# Altium PCB E1811HUBPCB_3.PcbDoc
Units mil, origin at the board's own origin, x right, y up, seen from the top; angles counter-clockwise.
Board outline 4490 x 1810 mil, 2 copper layers (Top Layer, Bottom Layer), stack 62.8 mil thick; 15 components, 40 nets, 96 pads, 5 vias.
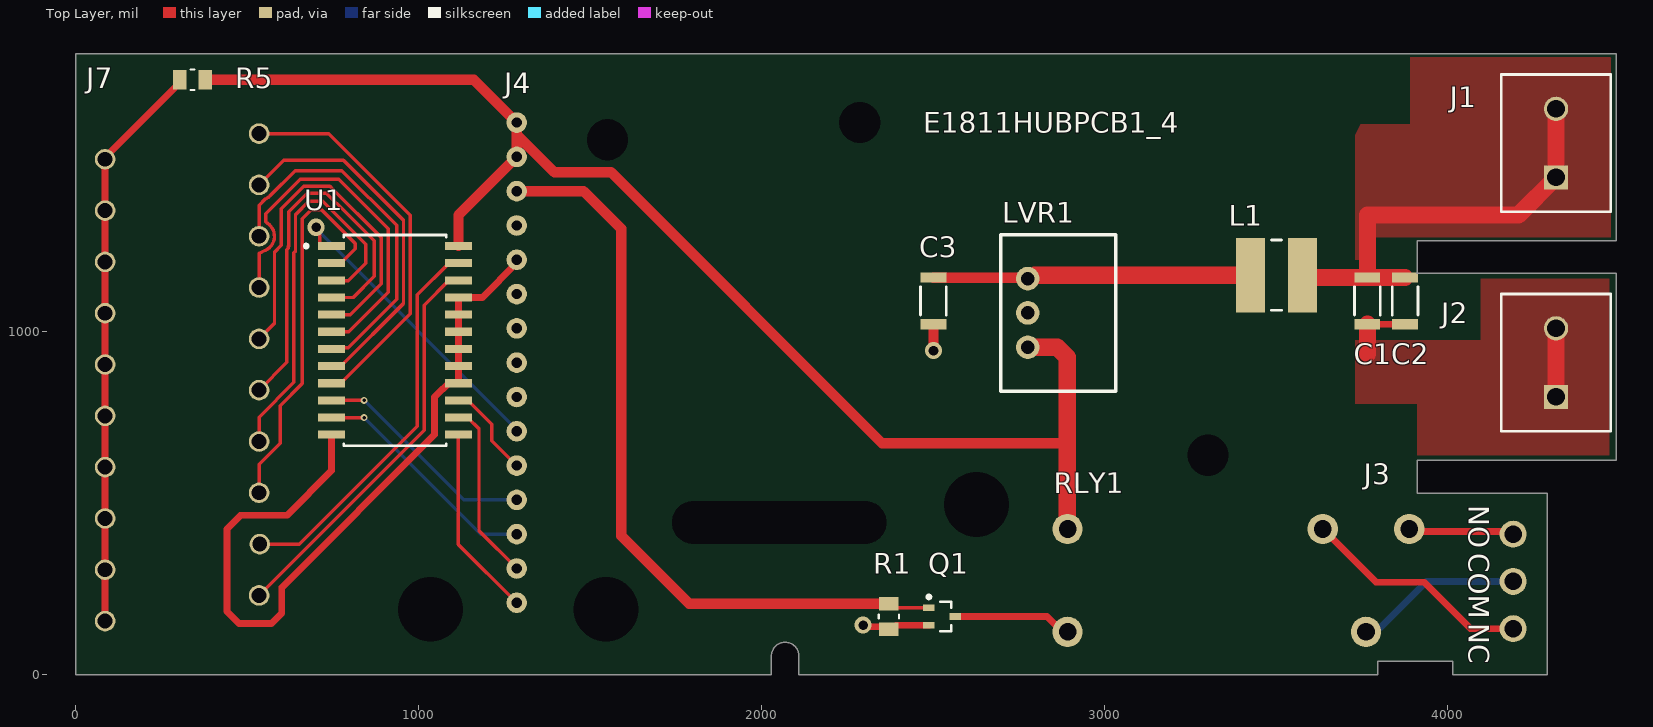
[diagram p0: Top Layer view]
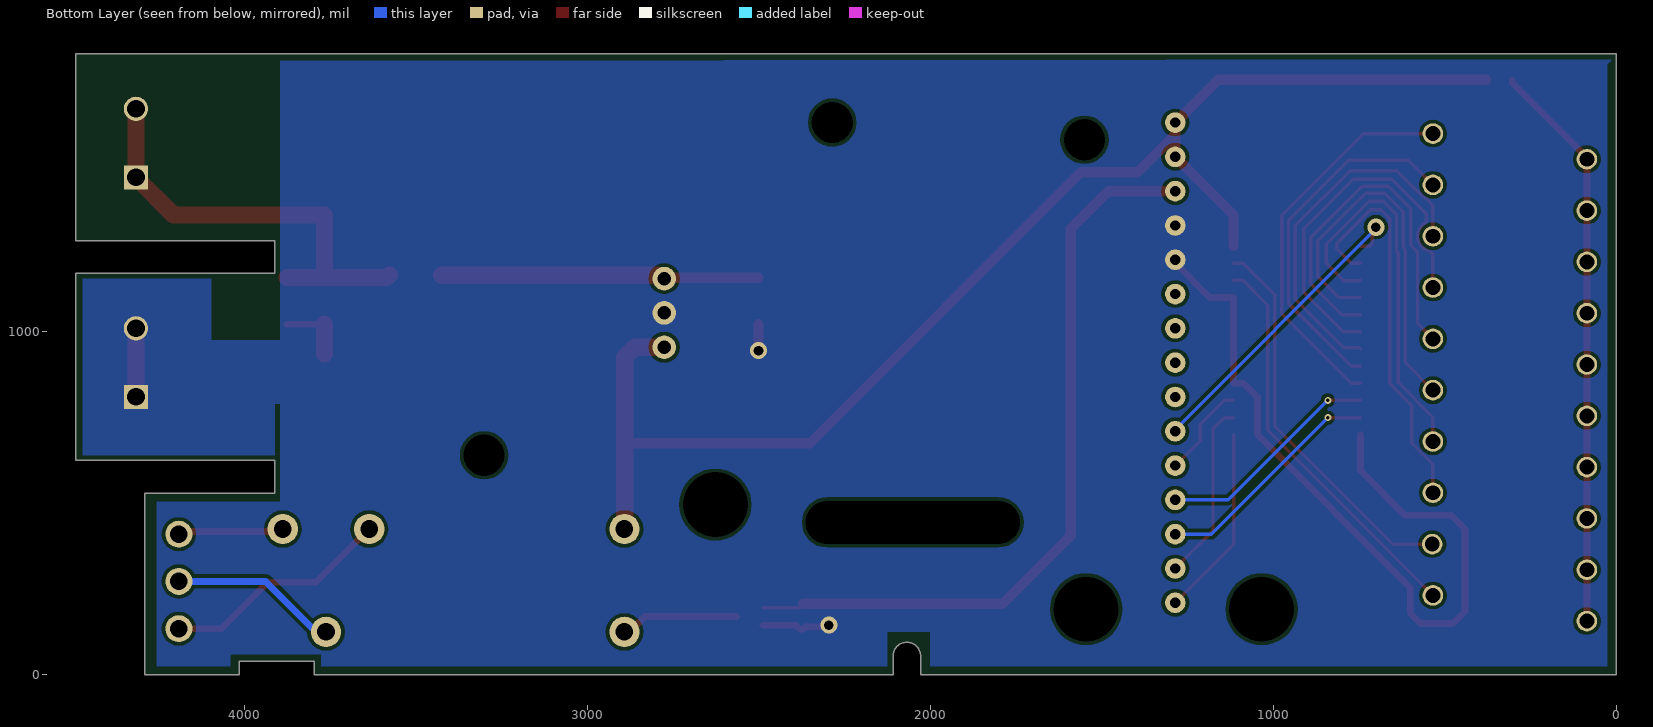
[diagram p1: Bottom Layer view, seen from below]
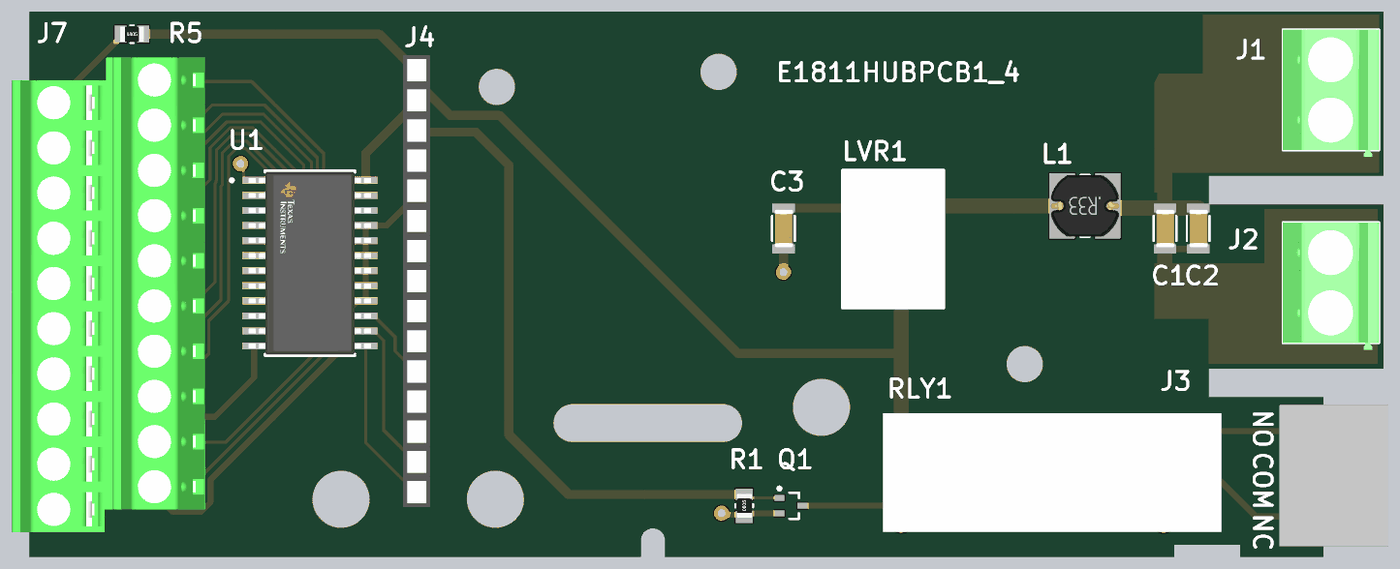
[diagram p2: 3D render of the assembled board from above, using the file's embedded part models]

## Layer stack, top to bottom
Top Solder: solder mask 0.4, Solder Resist, Dk 3.5
Top Layer: signal copper 1.4
Dielectric 1: dielectric 60, FR-4, Dk 4.8
Bottom Layer: signal copper 1.4
Bottom Solder: solder mask 0.4, Solder Resist, Dk 3.5

## Board outline
0,0 2027.5,0 2027.5,55 cw(c2067.5,55) 2107.5,55 2107.5,0 3795,0 3795,40 4013.62,40 4013.62,39.37 4013.78,0 4290,0 4290,530 3910,530 3910,625 4490,625 4490,1170 3910,1170 3910,1265 4490,1265 4490,1810 0,1810

## Design rules (kind name [scope] priority, off if disabled: settings)
Clearance [All] p1: gap=10 ignorepadtopadclearanceinfootprint=TRUE
Creepage [All] p1: checkdistance=10
PlaneConnect [All] p1: planeconnectstyle=Direct reliefexpansion=20 reliefentries=4 reliefconductorwidth=10 reliefairgap=10
PolygonConnect [All] p1: connectstyle=Direct reliefconductorwidth=10 reliefentries=4 polygonreliefangle="90 Angle" airgapwidth=10
RoomDefinition Sheet1 [InComponentClass('Sheet1')] p1: confinementstyle=ConfineIn formatcopy=TRUE lockcomponents=FALSE outline 6045,60 14050,60 14050,2110 6045,2110
RoutingVias [All] p1: holewidth=28 width=50 viastyle="Through Hole" minholewidth=28 minwidth=50 maxholewidth=28 maxwidth=50
SolderMaskExpansion [All] p1: expansion=4 istentingtop=FALSE
Width [All] p1: maxlimit=60 minlimit=10 preferedwidth=10
29 further rules are at their usual default settings.

## Components (designator, comment, footprint, x,y, rotation, side; value= is the part's Value field where it differs from the comment)
C1 "CGA5L3X5R1H106K160AB" FP-CGA5L-0_3-0_1-IPC_B 3765,1090 r270 top
C2 "CGA5L3X5R1H106K160AB" FP-CGA5L-0_3-0_1-IPC_B 3875,1090 r270 top
C3 "CGA5L3X5R1H106K160AB" FP-CGA5L-0_3-0_1-IPC_B 2500,1090 r270 top
J1 "1729128" PHOE-1729128-2_V 4315,1550 r90 top
J2 "1729128" PHOE-1729128-2_V 4315,910 r90 top
J3 "39502-1003" 39502-1003 4190,410 r270 top
J4 "PPPC151LFBN-RC" PPPC151LFBN-RC 1285,210 r90 top
J7 "1708110" 1708110 533.82,1577.83 r270 top
L1 "744774122" WE-PD2-M 3500,1165 r180 top
LVR1 "173010542" 173010542 3030.91,826.65 r90 top
Q1 "BSS138PW,115" NXP-SOT323_M 2525,170 r0 top
R1 "10K" RESC2012N 2370,170 r90 top
R5 "10K" RESC2012N 340,1735 r0 top
RLY1 "G6RL-14-ASI-DC3" G6RL-14-ASI-DC3 2890.91,125 r180 top
U1 "CD74HC4067M96" FP-DW0024A-MFG 930,975 r0 top

## Footprints (in the part's own frame and the unit in brackets; to place one, negate y for a bottom-side part, rotate by r counter-clockwise, add the part's x,y. Pads: shape width x height; smd on the part's side, far side on the other; paste and mask are expansions set on the pad)
39502-1003 [mm]
  round 2 hole 1.3: 1(0,0) 2(3.5,0) 3(7,0)
  body extent -2.41,-1.14 9.5,8, height 6.86
1708110 [mm]
  round 1.524 hole 1.1: 1(0,0) 2(3.8,0) 3(7.6,0) 4(11.4,0) 5(15.2,0) 6(19,0) 7(22.8,0) 8(26.6,0) 9(30.4,0.054) 10(34.2,0) 11(1.9,-11.4) 12(5.7,-11.4) 13(9.5,-11.4) 14(13.3,-11.4) 15(17.1,-11.4) 16(20.9,-11.4) 17(24.7,-11.4) 18(28.5,-11.4) 19(32.3,-11.4) 20(36.1,-11.4)
  body extent -2.03,-15.06 37.98,1.27, height 16.2
173010542 [mm]
  round 1.75 hole 1: 1(8.34,6.5) 2(5.8,6.5) 3(3.26,6.5)
  silkscreen extent 0,0 11.6,8.5, body extent 0,0 11.6,8.5, height 10.25
FP-CGA5L-0_3-0_1-IPC_B [mm]
  rect 0.756x1.906 smd paste+0 mask+0: 1(-1.725,0) 2(1.725,0)
  silkscreen extent -1.05,-0.95 1.05,0.95, body extent -2.35,-1.2 2.35,1.2, height 0.25
FP-DW0024A-MFG [mm]
  rect 2x0.6 smd paste-1000 mask+0: 1(-4.7,6.985) 2(-4.7,5.715) 3(-4.7,4.445) 4(-4.7,3.175) 5(-4.7,1.905) 6(-4.7,0.635) 7(-4.7,-0.635) 8(-4.7,-1.905) 9(-4.7,-3.175) 10(-4.7,-4.445) 11(-4.7,-5.715) 12(-4.7,-6.985) 13(4.7,-6.985) 14(4.7,-5.715) 15(4.7,-4.445) 16(4.7,-3.175) 17(4.7,-1.905) 18(4.7,-0.635) 19(4.7,0.635) 20(4.7,1.905) 21(4.7,3.175) 22(4.7,4.445) 23(4.7,5.715) 24(4.7,6.985)
  silkscreen extent -6.7,-7.8 3.8,7.8, body extent -5.8,-7.98 5.8,7.98, height 0.25
G6RL-14-ASI-DC3 [mm]
  round 2.25 hole 1.3: 1(0,0) 2(-22.1,0) 3(-25.3,-7.62) 4(-18.9,-7.62) 5(0,-7.62)
  body extent -26.95,-8.94 1.55,1.06, height 12.3
NXP-SOT323_M [mm] "SOT23, 3-Leads, Body 2.2x1.35mm, Pitch 0.65mm, IPC Low Density"
  rect 0.85x0.5 smd: 1(-0.975,0.65) 2(-0.975,-0.65) 3(0.975,0)
  silkscreen extent -1.1,-1.1 0.67,1.57, body extent -0.67,-1.1 0.67,1.1, height 1.1
PHOE-1729128-2_V [mm] "Receptacle, 2-Leads, Body 8.1x10.16mm, Pitch 5.08mm"
  rect 1.8x1.8 hole 1.3: 1(-2.54,0)
  round 1.8 hole 1.3: 2(2.54,0)
  silkscreen extent -5.08,-4.05 5.08,4.05, body extent -5.65,-4.05 5.08,4.05, height 10.01
PPPC151LFBN-RC [mil]
  round 60 hole 30: 1(0,0) 2(100,0) 3(200,0) 4(300,0) 5(400,0) 6(500,0) 7(600,0) 8(700,0) 9(800,0) 10(900,0) 11(1000,0) 12(1100,0) 13(1200,0) 14(1300,0) 15(1400,0)
  body extent -45,-44 1456,46, height 371
RESC2012N [mm] "Chip Resistor, Body 2.0x1.3mm, IPC Med Density"
  rect 1x1.45 smd: 1(-0.95,0) 2(0.95,0)
  silkscreen extent -0.15,-0.75 0.15,0.75, body extent -1,-0.63 1,0.63, height 0.59
WE-PD2-M [mm] "SMD Inductor, 2-Leads, Body 5.8 x 5.2 mm"
  rect 2.15x5.5 smd: 1(-1.925,0) 2(1.925,0)
  silkscreen extent -0.38,-2.6 0.38,2.6, body extent -2.89,-2.6 2.89,2.6, height 4.49

## Part data
C1 C2 C3: library part CMP-2000-07597-2, "Cap Ceramic 10uF 50V X5R 10% Pad SMD 1206 +85°C Automotive T/R", Capacitance=10uF, Case Code (Imperial)=1206, Case Code (Metric)=3216, Dielectric=X5R, Max Operating Temperature=85°C, Min Operating Temperature=-55°C, Package Quantity=1, Ratings=AEC-Q200, Tolerance=10%, Voltage Rating=50V, Case/Package=1206, Composition=Ceramic, Depth=1.6mm, Height=1.6mm, Lead Free="Lead Free", Length=3.2mm, Mount="Surface Mount", Packaging="Tape and Reel", Radiation Hardening=No, REACH SVHC="No SVHC", Termination=SMD/SMT, Thickness=0.063inch, Voltage Rating (DC)=50V, Weight=0.000571oz, Width=1.6mm
J1: library part CMP-2000-05815-1, "PCB Terminal Block, 13.5 A, 400 V, 2-Pin THD, RoHS, Bulk", Color=Green, Current=10A, Current Rating=13500mA, Flammability Rating="UL94 V-0", Manufacturer="Phoenix Contact", Max Current Rating=13.5A, Max Operating Temperature=100°C, Max Supply Voltage=400V, Min Operating Temperature=-20°C, Package Description="2-Pin Through Hole Device, Body 8.1 x 10.16 mm, Pitch 5.08 mm", Package Quantity=50, Package Reference=1729128-2, Package Version=03/2015, Test Voltage=4kV, Voltage=300V, Approvals=UL,CSA, Category="Terminal Blocks", ComponentLink1Description=https://datasheet.ciiva.com/823/1729128-823779.pdf?src-supplier=Digi-Key, ComponentLink1URL=https://datasheet.ciiva.com/823/1729128-823779.pdf?src-supplier=Digi-Key, ComponentLink2Description=https://datasheet.ciiva.com/15169/getdatasheetpartid-199310-15169845.pdf?src-supplier=Verical, ComponentLink2URL=https://datasheet.ciiva.com/15169/getdatasheetpartid-199310-15169845.pdf?src-supplier=Verical, ComponentLink3Description=https://datasheet.ciiva.com/16046/1729128-16046181.pdf?src-supplier=Onlinecomponents.com, ComponentLink3URL=https://datasheet.ciiva.com/16046/1729128-16046181.pdf?src-supplier=Onlinecomponents.com, ComponentLink4Description=https://datasheet.ciiva.com/14607/70054405-14607157.pdf?src-supplier=Allied+Electronics, ComponentLink4URL=https://datasheet.ciiva.com/14607/70054405-14607157.pdf?src-supplier=Allied+Electronics, ComponentLink5Description=https://datasheet.ciiva.com/29218/743664-da-01-en-printklemmenblock-mkdsn-1-5-2-5-08-29218154.pdf?src-supplier=Conrad, ComponentLink5URL=https://datasheet.ciiva.com/29218/743664-da-01-en-printklemmenblock-mkdsn-1-5-2-5-08-29218154.pdf?src-supplier=Conrad, Connector Type=Screw, Contact Material=Tin, Datasheet URL=https://datasheet.ciiva.com/16046/1729128-16046181.pdf, Datasheet Version=12/2013, Depth=8.1mm, Height=13.5mm, Housing Color=Green, Housing Material=Polyamide, Insulation Material=Nylon, Lead Free="Lead Free", Length=8.1mm, Manufacturer Part Number=1729128, Manufacturer URL=http://www.phoenixcontact.com/, Mount="Through Hole", Mounting Technology=ThroughHole, No. of Positions=2, No. of Rows=1, Number Of Circuits=2, Number of Contacts=2, Number of Levels=1, Number of Pins=2, Number of Poles=2, Number of Positions=2, Number of Positions Per Level=2, Number of Rows=1, Orientation=Horizontal, Package URL=https://www.phoenixcontact.com/online/portal/pi/pxc/product_detail_page/!ut/p/b1/3VdJjqNKFDxLH8AFycySyWY2ozFsEPOMMQaDOX1XedGL_1Vdm5YXJleknhSKeBkvI6EA8ncAo3AYoDhBQGco6KN7VURTdemj9us_IEKEZo_YHiPAEWEFmDGOHMORkqKYCORBZxgL7ZoaZYcbFFUZ3fqxSY6GOuxydWUuHqz1ynmMFygu583Bob0Ewr6Sd_l-5m-kAueHiB0jpRwZwe58wwtkpxtMYd_LmGcDRU02dRNEyWt6Y2ti5pSyJ_reIkzIulrqApdnbT11V5jnCKbYNCvhEM1MCpPByat_X379-iThf08CI5GfOPqfBeS3BRoBOdD55AKVv0iLwCMq-2BrzXWSGRH7pUGD9uwXQjiph3xL0DKQwdGa0JImiIOmBNOestqgwTHSSs2oOep-78apyXQBvNi8ZLaFjvjWvcaUEBu0MC6Wbe-d6mB0FAebo2lUWinqYaZs5DAYzV0RP9yitUjnGJ0iI9xhZkT42OCQNUJJhkgWINNQLP2JFP6OpMg3JCVg70jqHT0lvKOnhHf0lPuOnnLf0VPuWx6_dxwUIvwk5WMkT0kLL1mh61l2yZVSzG3pYV_bqo-mj6uMKwKwdnnW8Jh5RTOJzMOA5c-eJDaZQw4mTMPH02PvS_ZAqNVjVTo2WyYLkwH_KU1mmmG5kjRhDqPXLwwVHvVOjCM60-fpXvTDfMGW1PVFVS1r4e4yVDk4ZdNbkUHvqPqQSeian4UD39fNKmachqdJ1NJbyk8rXT9mXTvPk3oE5meulKGgiruPJek-4I9hTT6G8ZLOyRSm2RRVbThERQad5OS28hdt4YW4vG0stgYYzsWsK4_7y6DZMjJSCqri1kyiZR5vD7pwIrNR7QwPHTcLTI5qT7eRlpHrdGiupYlqQDJ7zy_CND8fWWBoLRXxk1RVcXiBQwbTD4Xi7KL-FuO94t9xaqweXzH, Packaging=Bulk, Packing=Bulk, PartNumber=1729128, Pitch=5.08mm, Pricing 1="1=1.09000, 10=1.04700, 50=1.00100, 100=0.97370, 250=0.91000, 500=0.83720, 1000=0.77350, 2500=0.73710, 5000=0.69160 (USD)", Radiation Hardening=No, REACH SVHC="No SVHC", RoHS=TRUE, RoHS Compliant=Yes, Series=MKDSN, Stock 1=30124, Supplier 1=Digi-Key, Termination=Solder, Voltage Rating=400V, Weight=0.069842oz, Width=13.5mm, Wire Gauge (Max)=26AWG, Wire Gauge (Min)=14AWG, Wire/Cable Gauge=26AWG
J2: library part CMP-2000-05815-1, "PCB Terminal Block, 13.5 A, 400 V, 2-Pin THD, RoHS, Bulk", Color=Green, Current=10A, Current Rating=13500mA, Flammability Rating="UL94 V-0", Manufacturer="Phoenix Contact", Max Current Rating=13.5A, Max Operating Temperature=100°C, Max Supply Voltage=400V, Min Operating Temperature=-20°C, Package Description="2-Pin Through Hole Device, Body 8.1 x 10.16 mm, Pitch 5.08 mm", Package Quantity=50, Package Reference=1729128-2, Package Version=03/2015, Supplier Part Number 1=277-1247-ND, Test Voltage=4kV, Voltage=300V, Approvals=UL,CSA, Category="Terminal Blocks", ComponentLink1Description=https://datasheet.ciiva.com/823/1729128-823779.pdf?src-supplier=Digi-Key, ComponentLink1URL=https://datasheet.ciiva.com/823/1729128-823779.pdf?src-supplier=Digi-Key, ComponentLink2Description=https://datasheet.ciiva.com/15169/getdatasheetpartid-199310-15169845.pdf?src-supplier=Verical, ComponentLink2URL=https://datasheet.ciiva.com/15169/getdatasheetpartid-199310-15169845.pdf?src-supplier=Verical, ComponentLink3Description=https://datasheet.ciiva.com/16046/1729128-16046181.pdf?src-supplier=Onlinecomponents.com, ComponentLink3URL=https://datasheet.ciiva.com/16046/1729128-16046181.pdf?src-supplier=Onlinecomponents.com, ComponentLink4Description=https://datasheet.ciiva.com/14607/70054405-14607157.pdf?src-supplier=Allied+Electronics, ComponentLink4URL=https://datasheet.ciiva.com/14607/70054405-14607157.pdf?src-supplier=Allied+Electronics, ComponentLink5Description=https://datasheet.ciiva.com/29218/743664-da-01-en-printklemmenblock-mkdsn-1-5-2-5-08-29218154.pdf?src-supplier=Conrad, ComponentLink5URL=https://datasheet.ciiva.com/29218/743664-da-01-en-printklemmenblock-mkdsn-1-5-2-5-08-29218154.pdf?src-supplier=Conrad, Connector Type=Screw, Contact Material=Tin, Datasheet URL=https://datasheet.ciiva.com/16046/1729128-16046181.pdf, Datasheet Version=12/2013, Depth=8.1mm, Height=13.5mm, Housing Color=Green, Housing Material=Polyamide, Insulation Material=Nylon, Lead Free="Lead Free", Length=8.1mm, Manufacturer Part Number=1729128, Manufacturer URL=http://www.phoenixcontact.com/, Mount="Through Hole", Mounting Technology=ThroughHole, No. of Positions=2, No. of Rows=1, Number Of Circuits=2, Number of Contacts=2, Number of Levels=1, Number of Pins=2, Number of Poles=2, Number of Positions=2, Number of Positions Per Level=2, Number of Rows=1, Orientation=Horizontal, Package URL=https://www.phoenixcontact.com/online/portal/pi/pxc/product_detail_page/!ut/p/b1/3VdJjqNKFDxLH8AFycySyWY2ozFsEPOMMQaDOX1XedGL_1Vdm5YXJleknhSKeBkvI6EA8ncAo3AYoDhBQGco6KN7VURTdemj9us_IEKEZo_YHiPAEWEFmDGOHMORkqKYCORBZxgL7ZoaZYcbFFUZ3fqxSY6GOuxydWUuHqz1ynmMFygu583Bob0Ewr6Sd_l-5m-kAueHiB0jpRwZwe58wwtkpxtMYd_LmGcDRU02dRNEyWt6Y2ti5pSyJ_reIkzIulrqApdnbT11V5jnCKbYNCvhEM1MCpPByat_X379-iThf08CI5GfOPqfBeS3BRoBOdD55AKVv0iLwCMq-2BrzXWSGRH7pUGD9uwXQjiph3xL0DKQwdGa0JImiIOmBNOestqgwTHSSs2oOep-78apyXQBvNi8ZLaFjvjWvcaUEBu0MC6Wbe-d6mB0FAebo2lUWinqYaZs5DAYzV0RP9yitUjnGJ0iI9xhZkT42OCQNUJJhkgWINNQLP2JFP6OpMg3JCVg70jqHT0lvKOnhHf0lPuOnnLf0VPuWx6_dxwUIvwk5WMkT0kLL1mh61l2yZVSzG3pYV_bqo-mj6uMKwKwdnnW8Jh5RTOJzMOA5c-eJDaZQw4mTMPH02PvS_ZAqNVjVTo2WyYLkwH_KU1mmmG5kjRhDqPXLwwVHvVOjCM60-fpXvTDfMGW1PVFVS1r4e4yVDk4ZdNbkUHvqPqQSeian4UD39fNKmachqdJ1NJbyk8rXT9mXTvPk3oE5meulKGgiruPJek-4I9hTT6G8ZLOyRSm2RRVbThERQad5OS28hdt4YW4vG0stgYYzsWsK4_7y6DZMjJSCqri1kyiZR5vD7pwIrNR7QwPHTcLTI5qT7eRlpHrdGiupYlqQDJ7zy_CND8fWWBoLRXxk1RVcXiBQwbTD4Xi7KL-FuO94t9xaqweXzH, Packaging=Bulk, Packing=Bulk, PartNumber=1729128, Pitch=5.08mm, Pricing 1="1=1.09000, 10=1.04700, 50=1.00100, 100=0.97370, 250=0.91000, 500=0.83720, 1000=0.77350, 2500=0.73710, 5000=0.69160 (USD)", Radiation Hardening=No, REACH SVHC="No SVHC", RoHS=TRUE, RoHS Compliant=Yes, Series=MKDSN, Stock 1=30124, Supplier 1=Digi-Key, Termination=Solder, Voltage Rating=400V, Weight=0.069842oz, Width=13.5mm, Wire Gauge (Max)=26AWG, Wire Gauge (Min)=14AWG, Wire/Cable Gauge=26AWG
J3: "TERM BLOCK HDR 3POS 90DEG 3.5MM", Color=Black, Contact Resistance=8mR, Current=8A, Flammability Rating="UL94 V-0", Manufacturer=Molex, Manufacturer Part Number=0395021003, Max Operating Temperature=105°C, Min Operating Temperature=-40°C, Package Quantity=1280, Supplier Part Number 1=WM7771-ND, Voltage=300V, Category="Headers and Wire Housings", ComponentLink1Description=http://www.onlinecomponents.com/datasheet/395021003.aspx?p=17943918&src-supplier=Onlinecomponents.com, ComponentLink1URL=http://www.onlinecomponents.com/datasheet/395021003.aspx?p=17943918&src-supplier=Onlinecomponents.com, ComponentLink2Description=http://components.arrow.com/part/dataview/0323_01936340?src-supplier=Arrow+Europe, ComponentLink2URL=http://components.arrow.com/part/dataview/0323_01936340?src-supplier=Arrow+Europe, ComponentLink3Description=http://www.molex.com/webdocs/datasheets/pdf/en-us/0395021003_TERMINAL_BLOCKS.pdf?src-supplier=Avnet, ComponentLink3URL=http://www.molex.com/webdocs/datasheets/pdf/en-us/0395021003_TERMINAL_BLOCKS.pdf?src-supplier=Avnet, ComponentLink4Description=https://www.molex.com/pdm_docs/sd/395021002_sd.pdf?src-supplier=Digi-Key, ComponentLink4URL=https://www.molex.com/pdm_docs/sd/395021002_sd.pdf?src-supplier=Digi-Key, ComponentLink5Description=http://components.arrow.com/part/dataview/44158187S8420486N3303?src-supplier=Arrow+Electronics, ComponentLink5URL=http://components.arrow.com/part/dataview/44158187S8420486N3303?src-supplier=Arrow+Electronics, Contact Material=Brass, Contact Plating=Tin, Current Rating=8A, Depth=9.2mm, ELV=Compliant, Halogen Free="Low Halogen", Housing Color=Black, Housing Material=Polyamide, Lead Free="Lead Free", Length=11.89mm, Mount="Through Hole", Number Of Circuits=3, Number of Contacts=3, Number of Levels=1, Number of Positions=3, Number of Positions Per Level=3, Number of Rows=1, Orientation="Right Angle", Packaging=Bulk, Pitch=3.5mm, Pricing 1="1=0.78000, 10=0.64800, 100=0.54000, 1000=0.43200, 5000=0.37800, 10000=0.35910 (USD)", REACH SVHC="No SVHC", RoHS=Yes, RoHS Compliant=Yes, Series="Eurostyle™ ESE 39502", Stock 1=1366, Supplier 1=Digi-Key, Termination=Solder, Voltage Rating=300V, Width=9.2mm
J4: "CONN HEADER FMALE 15POS .1\" GOLD", Color=Black, Manufacturer=Sullins, Package Quantity=1000, Supplier Part Number 1=S7048-ND, Category=Connectors, ComponentLink1Description=https://media.digikey.com/pdf/Data%20Sheets/Sullins%20PDFs/Female_Headers.100_DS.pdf?src-supplier=Digi-Key, ComponentLink1URL=https://media.digikey.com/pdf/Data%20Sheets/Sullins%20PDFs/Female_Headers.100_DS.pdf?src-supplier=Digi-Key, Connector Type=Header, Contact Material=Bronze, Contact Plating=Gold, Contact Type="Female Socket", Height=8.5mm, Housing Material=Plastic, Lead Free="Lead Free", Length=38.6mm, Manufacturer Part Number=PPPC151LFBN-RC, Mount="Through Hole", Number of Positions=15, Number of Rows=1, Packaging=Bulk, Pitch=0.1inch, Pricing 1="1=1.02000, 10=0.89300, 100=0.77020, 500=0.63018, 1000=0.56016, 5000=0.50570 (USD)", RoHS=Yes, RoHS Compliant=Yes, Stock 1=4250, Supplier 1=Digi-Key, Termination=Solder, Width=2.5mm
J7: "CONN TERM BLOCK 3.81MM 10POS", Color=Green, Current=10A, Current Rating=8A, Flammability Rating="UL94 V-0", Manufacturer="Phoenix Contact", Package Quantity=50, Supplier Part Number 1=277-1364-ND, Voltage=300V, Voltage Rating=200V, Approvals=UL,CSA,cULus,CB,EAC, Category="Terminal Blocks", ComponentLink1Description=https://datasheet.ciiva.com/16071/1708110-16071989.pdf?src-supplier=Onlinecomponents.com, ComponentLink1URL=https://datasheet.ciiva.com/16071/1708110-16071989.pdf?src-supplier=Onlinecomponents.com, ComponentLink2Description=https://datasheet.ciiva.com/824/1708110-824363.pdf?src-supplier=Digi-Key, ComponentLink2URL=https://datasheet.ciiva.com/824/1708110-824363.pdf?src-supplier=Digi-Key, ComponentLink3Description=https://datasheet.ciiva.com/14609/70054443-14609623.pdf?src-supplier=Allied+Electronics, ComponentLink3URL=https://datasheet.ciiva.com/14609/70054443-14609623.pdf?src-supplier=Allied+Electronics, Connector Type=Screw, Contact Material=Tin, Depth=16.2mm, Gender=Male, Height=16.2mm, Housing Color=Green, Housing Material=Nylon, Insulation Material=Nylon, Lead Free="Lead Free", Length=38.1mm, Manufacturer Part Number=1708110, Material=Polyamide, Max Current Rating=10A, Mount="Through Hole", Number Of Circuits=20, Number of Contacts=20, Number of Levels=2, Number of Pins=20, Number of Poles=10, Number of Positions=10, Number of Positions Per Level=10, Number of Rows=2, Orientation=Straight, Packaging=Bulk, Pitch=3.81mm, Pricing 1="1=18.84000, 10=18.32900, 50=17.13000, 100=15.75970, 250=14.56056, 500=13.87542, 1000=13.01891 (USD)", RoHS=Yes, RoHS Compliant=Yes, Series="COMBICON MKKDS", Stock 1=37, Stripping Length=5mm, Supplier 1=Digi-Key, Termination=Screw, Weight=3lb, Width=16.3mm, Wire Gauge (Max)=30AWG, Wire Gauge (Min)=26AWG
L1: library part CMP-0227-00444-1, "SMD Power Inductor WE-PD2, L = 22.0 µH", Inductance="22.0 ÂµH", ComponentLink1Description="Manufacturer Link", ComponentLink1URL=http://www.we-online.com, ComponentLink2Description=Datasheet, ComponentLink2URL=http://www.we-online.de/katalog/media/pdf/744774122.pdf, DatasheetVersion="ver 2, Jun-2005", PackageDescription="SMD Inductor, 2-Leads, Body 5.8 x 5.2 mm", PackageReference=WE-PD2-M, PackageVersion=2005
Q1: library part CMP-1259-00109-1, "N-Channel Trench MOSFET, 60 V, 0.32 A, -55 to 150 degC, 3-Pin SOT323, Tape and Reel", Case/Package=SOT, Continuous Drain Current (ID)=320mA, Drain to Source Breakdown Voltage=60V, Drain to Source Resistance=1.6R, Gate to Source Voltage (Vgs)=20V, Input Capacitance=50pF, Manufacturer="NXP Semiconductors", Manufacturer Part Number="BSS138PW,115\"\"", Max Operating Temperature=150°C, Max Power Dissipation=260mW, Min Operating Temperature=-55°C, Package Quantity=3000, Supplier Part Number 1=1727-1143-1-ND, Automotive Qualified=Y, Category=MOSFETs, Channel Type=N, Code_JEITA=SC-70, ComponentLink1Description="Manufacturer URL", ComponentLink1URL=http://www.nxp.com/, ComponentLink2Description=Datasheet, ComponentLink2URL=http://www.nxp.com/documents/data_sheet/BSS138PW.pdf, ComponentLink3Description="Package Specification", ComponentLink3URL=http://www.nxp.com/documents/outline_drawing/sot323_po.pdf, ComponentLink4Description=https://datasheet.ciiva.com/6371/bss138pw-6371075.pdf?src-supplier=Digi-Key, ComponentLink4URL=https://datasheet.ciiva.com/6371/bss138pw-6371075.pdf?src-supplier=Digi-Key, ComponentLink5Description=https://datasheet.ciiva.com/18567/bss138pw-18567014.pdf?src-supplier=Digi-Key, ComponentLink5URL=https://datasheet.ciiva.com/18567/bss138pw-18567014.pdf?src-supplier=Digi-Key, ComponentLink6Description=https://datasheet.ciiva.com/18567/bss138pw-18567015.pdf?src-supplier=Digi-Key, ComponentLink6URL=https://datasheet.ciiva.com/18567/bss138pw-18567015.pdf?src-supplier=Digi-Key, ComponentLink7Description=https://datasheet.ciiva.com/18567/bss138pw-18567016.pdf?src-supplier=Digi-Key, ComponentLink7URL=https://datasheet.ciiva.com/18567/bss138pw-18567016.pdf?src-supplier=Digi-Key, ComponentLink8Description=https://datasheet.ciiva.com/1255/bss138pw-1255034.pdf?src-supplier=Newark, ComponentLink8URL=https://datasheet.ciiva.com/1255/bss138pw-1255034.pdf?src-supplier=Newark, Contact Plating=Tin, DatasheetVersion="Rev. 1", Drain to Source Voltage (Vdss)=60V, Fall Time=4ns, ID [max] (A)=0.32, IDM [max] (A)=1.2, Lead Free="Lead Free", Max Dual Supply Voltage=60V, Mounting Technology="Surface Mount", Number of Elements=1, Number of Pins=3, PackageDescription="3-Pin Small Outline Transistor Package, Body 2 x 1.25 mm, Pitch 0.65 mm", PackageReference=SOT323, PackageVersion="06-03-16, 03/2006", Packaging="Tape and Reel", Packing="Tape & Reel", PartNumber=BSS138PW,115, Power Dissipation=260mW, Pricing 1="1=0.210000, 10=0.146000, 100=0.071100, 500=0.059280, 1000=0.041180 (USD)", Radiation Hardening=No, Rds On Max=1.6R, Rise Time=3ns, RoHS=Yes, Stock 1=503503, Supplier 1=Digi-Key, Turn-Off Delay Time=9ns, Turn-On Delay Time=2ns, VDS [max] (V)=60, VGSth [typ] (V)=1.2
R1 R5: library part Res_10K_0805, "RES 10K OHM 1/8W 1% 0805", Case Code (Imperial)=0805, Case Code (Metric)=2012, Manufacturer=Vishay, Manufacturer P/N=CRCW080510K0FKEA, Max Operating Temperature=155°C, Min Operating Temperature=-55°C, Package Quantity=5000, Power Rating=125mW, Resistance=10kR, Supplier Part Number 1=541-10.0KCCT-ND, Temperature Coefficient=100ppm/°C, Tolerance=1%, Voltage Rating=150V, Case/Package=0805, ComponentLink4Description=http://www.vishay.com/docs/20035/dcrcwe3.pdf, ComponentLink4URL=http://www.vishay.com/docs/20035/dcrcwe3.pdf, Composition="Thick Film", Contact Plating=Tin, Depth=1.25mm, Height=0.45mm, Lead Free="Lead Free", Length=2mm, Military Standard=Not, Radiation Hardening=No, REACH SVHC=Unknown, Supplier 1=Digi-Key, Termination=SMD/SMT, Voltage Rating (DC)=150V, Weight=0.000194oz, Width=1.25mm
RLY1: "RELAY GENERAL PURPOSE SPDT 8A 3V", Coil Current=73.3mA, Coil Power=220mW, Coil Resistance=40R, Coil Voltage (DC)=3V, Contact Current Rating=8A, Manufacturer=Omron, Max Operating Temperature=85°C, Max Voltage Rating (AC)=400V, Max Voltage Rating (DC)=300V, Min Operating Temperature=-40°C, Package Quantity=100, Supplier Part Number 1=Z2901-ND, Category="Power Relays", Coil Type=Non-Latching, ComponentLink1Description=https://datasheet.ciiva.com/8687/g6rl-0911-8687382.pdf?src-supplier=Avnet, ComponentLink1URL=https://datasheet.ciiva.com/8687/g6rl-0911-8687382.pdf?src-supplier=Avnet, ComponentLink2Description=https://datasheet.ciiva.com/2407/g6rl-0911-2407665.pdf?src-supplier=Digi-Key, ComponentLink2URL=https://datasheet.ciiva.com/2407/g6rl-0911-2407665.pdf?src-supplier=Digi-Key, Contact Material=Tin,Silver, Manufacturer Part Number=G6RL-14-ASI-DC3, Mount="Through Hole", Number of Pins=5, Operate Time=10ms, Packaging=Bulk, Pricing 1="1=3.90000, 10=3.65200, 25=3.24600, 50=3.08380, 100=2.92140, 250=2.59680, 500=2.43450, 1000=2.27220, 5000=2.19105 (USD)", Radiation Hardening=No, Relay Type="General Purpose", Release Time=5ms, RoHS=Yes, Stock 1=2855, Supplier 1=Digi-Key, Termination="PC Pin", Throw Configuration=SPDT, Weight=7.8g
U1: library part CMP-04901-000007-1, "IC MUX/DEMUX 1X16 24SOIC", Ambient Temperature Range High=+125°C, Ambient Temperature Range Low=-55°C, Manufacturer="Texas Instruments", Max Junction Temp=+150°C, Max Supply Voltage=6V, Min Supply Voltage=2V, Package=DW0024A, Quiescent Current=8uA, Temperature="-55°C to +125°C", Automotive=No, Category=IC, ComponentLink2Description=Datasheet, ComponentLink2URL=http://www.ti.com/lit/ds/symlink/cd74hc4067.pdf, Device Class L1="Integrated Circuits (ICs)", Device Class L2="Logic ICs", Device Class L3=Multiplexers, Digikey Description="IC MUX/DEMUX 1X16 24SOIC", Height=2.65mm, Ipc Land Pattern Name=SOIC127P1030X265-24, Lead Free=Yes, Logic Function Desc=Non-Inverting, Manufacturer Part Number=CD74HC4067M96, Mouser Description="Multiplexer Switch ICs Hi-Spd CMOS 16Ch Anl Mltplxr/Demltplxr", Number Of Circuits=1, Number Of Inputs=16, Number of Outputs=1, Octopart=https://octopart.com/cd74hc4067m96-texas+instruments-722802, Propagation Delay=6ns, RoHS=TRUE, Standoff Height=0.1mm, Temperature Range High=+125°C, Temperature Range Low=-55°C

## Free pads (board coordinates)
  round 0 hole 188.98: 0(1033.19,191.34)
  round 60 hole 120: 0(1550,1560) 0(2285,1610) 0(3300,640)
  round 0 hole 125 slot 625 at 0 deg: 0(2050.25,444.08)
  round 60 hole 188.98: 0(2625.88,496.37)
  oval 0x60 hole 188.98: 4(1545,191.34)

## Via types
v1: diameter 50, hole 28, Top Layer to Bottom Layer, 3 vias
v2: diameter 20, hole 10, Top Layer to Bottom Layer, 2 vias

## Nets (pads, with @x,y where several pads share a name; then routed paths per layer and width w, separated by ;. In a path a pad name is that pad's centre, name@x,y a point inside that pad or via, vN(x,y) a via of type N, cw(c..) or ccw(c..) an arc to the next point about the centre after c; other vN are vias at no path point)
GND: C1.2 C2.2 C3.2 J2.1 J2.2 J4.11 J4.12 LVR1.2 Q1.2 R1.1 U1.12 U1.16 U1.17 U1.18 U1.19 U1.20 U1.21 | length 2960.8
  Top Layer w20: U1.12 744.96,594.96 615,465 480,465 440,425 440,185 475,150 570,150 600,180 600,255 1045,700 1045,809.43 1069.62,834.05 1071.53,834.05 1087.48,850 U1.16 U1.17 U1.18 U1.19 U1.20 U1.21 1185,1100 1285,1200 J4.11 ; v1(2295,145) 2300,140 2362.6,140 R1.1 2378.86,132.6 2390.67,144.41 Q1.2 ; C1.2 C2.2
  Top Layer w30: v1(2500,945) C3.2
  Top Layer w50: 3765,935 C1.2 ; J2.2@4309.35,1010 J2.2 J2.1
NetC1_1: C1.1 C2.1 J1.1 J1.2 L1.1 | length 1279.8
  Top Layer w50: L1.1 3582.87,1157.91 C1.1 ; C2.1 C1.1 ; J1.2 J1.1 4205,1340 3765,1340 C1.1
NetC3_1: C3.1 L1.2 LVR1.1 | length 929.6
  Top Layer w30: C3.1 2500.11,1157.8 2782.31,1157.8 LVR1.1@2785.11,1155
  Top Layer w50: LVR1.1@2785.11,1155 2795.11,1165 L1.2
NetC4_2: 
NetC5_2: 
NetC6_2: 
NetC7_2: 
NetC8_2: 
NetC9_2: 
NetJ3_1: J3.1 RLY1.3 | length 309.2
  Top Layer w20: RLY1.3 3894.47,417.5 4182.5,417.5 J3.1
NetJ3_2: J3.2 RLY1.2 | length 490
  Bottom Layer w20: RLY1.2 3774.11,138.12 3803.12,138.12 3937.2,272.2 J3.2
NetJ3_3: J3.3 RLY1.4 | length 675.4
  Top Layer w20: RLY1.4 3790,270 3930,270 4065.59,134.41 J3.3
NetJ4_1: J4.1 U1.13 | length 560.4
  Top Layer w10: U1.13 1115.04,379.96 J4.1
NetJ4_2: J4.2 U1.14 | length 526.5
  Top Layer w10: U1.14 1142.6,750 1175,717.6 1175,420 J4.2
NetJ4_3: J4.3 U1.11 | length 680.9
  Top Layer w10: U1.11 v2(840,750)
  Bottom Layer w10: v2(840,750) 1180,410 J4.3
NetJ4_4: J4.4 U1.10 | length 660.2
  Top Layer w10: U1.10 v2(840,800)
  Bottom Layer w10: v2(840,800) 1130,510 J4.4
NetJ4_5: J4.5 U1.15 | length 276.5
  Top Layer w10: U1.15 1142.6,800 1212.42,730.18 1212.42,682.58 J4.5
NetJ4_6: J4.6 U1.1 | length 927.1
  Top Layer w10: v1(700,1305) 700,1294.18 710.59,1283.59 710.59,1256.81 717.4,1250 U1.1
  Bottom Layer w10: v1(700,1305) 700,1300 1285,715 J4.6
NetJ4_13: J4.13 Q1.1 R1.2 | length 2228.9
  Top Layer w10: R1.2 2381.81,195.59 Q1.1
  Top Layer w30: J4.13 1480,1410 1494.99,1395.01 1590,1300 1590,405 1787.6,207.4 R1.2
NetJ5_13: 
NetJ6_2: 
NetJ6_3: 
NetJ7_1: J7.1 U1.9 | length 1141.1
  Top Layer w10: J7.1 737.17,1577.83 975,1340 975,1052.48 772.52,850 U1.9
NetJ7_2: J7.2 U1.8 | length 1051.5
  Top Layer w10: J7.2 605.59,1500 780,1500 955,1325 955,1082.48 772.52,900 U1.8
NetJ7_3: J7.3 U1.7 | length 1063.6
  Top Layer w10: J7.3 533.82,1368.82 552.12,1387.12 ccw(c533.82,1428.23) 565.64,1396.41 639.23,1470 775,1470 935,1310 935,1095.38 793.47,953.86 748.82,953.86 U1.7
NetJ7_4: J7.4 U1.6 | length 1101.4
  Top Layer w10: J7.4 533.82,1228.68 553.28,1238.05 553.36,1238.09 ccw(c533.82,1278.62) 557.53,1316.87 ; 557.52,1316.87 553.82,1320.58 553.82,1343.82 654.46,1444.46 765.54,1444.46 770,1440 910,1300 910,1115 795,1000 U1.6
NetJ7_5: J7.5 U1.5 | length 1103.9
  Top Layer w10: J7.5 578.82,1024.41 578.82,1231.72 ; 578.84,1231.72 598.82,1251.7 598.82,1358.82 664.45,1424.45 740.55,1424.45 747.6,1417.4 890,1275 890,1140 800,1050 U1.5
NetJ7_6: J7.6 U1.4 | length 1140.1
  Top Layer w10: J7.6 615,910.98 615,1239.59 618.82,1243.41 618.82,1248.82 620,1250 620,1350 674.45,1404.45 730,1404.45 786.23,1348.23 786.77,1348.23 870,1265 870,1161.72 808.28,1100 U1.4
NetJ7_7: J7.7 U1.3 | length 1155.2
  Top Layer w10: J7.7 533.82,751.27 635,852.45 635,1230 640,1235 640,1341.72 678.28,1380 720,1380 845,1255 845,1200 793.47,1148.47 746.49,1148.47 U1.3
NetJ7_8: J7.8 U1.2 | length 1159.7
  Top Layer w10: J7.8 533.82,613.97 595,675.15 595,784.17 660,849.17 660,1330 685.86,1355.86 715.86,1355.86 814.22,1257.5 814.22,1241.7 772.52,1200 U1.2
NetJ7_9: J7.9 U1.23 | length 1142.4
  Top Layer w10: J7.9 650.98,380.98 995,725 995,1107.52 1087.48,1200 U1.23
NetJ7_10: J7.10 U1.22 | length 1175.5
  Top Layer w10: J7.10 1015,712.56 1015,1077.52 1087.48,1150 U1.22
NetJ7_11: J7.11 J7.12 J7.13 J7.14 J7.15 J7.16 J7.17 J7.18 J7.19 J7.20 R5.1 | length 1668.6
  Top Layer w20: J7.20 J7.19 J7.18 J7.17 J7.16 J7.15 J7.14 J7.13 J7.12 J7.11 85,1508.54 302.6,1726.14 R5.1
NetLED1_1: 
NetLED2_1: 
NetLED3_1: 
NetLED4_1: 
NetLED5_1: 
NetQ1_3: Q1.3 RLY1.1 | length 346.2
  Top Layer w20: Q1.3 2830.84,170 2875.84,125 RLY1.1
VCC: J4.14 J4.15 LVR1.3 R5.2 RLY1.5 U1.24 | length 3994.3
  Top Layer w30: R5.2 1160,1735 J4.15 1285,1575 ; U1.24 1115.04,1340.04 J4.14 1285,1575 ; 2890,675 2350,675 1560,1465 1395,1465 1285,1575
  Top Layer w50: LVR1.3@2780.26,955 2860.71,955 2890,925.71 2890,675 2890,435 RLY1.5@2880,425
pads on no net: J4.7 J4.8 J4.9 J4.10

## Polygon pours and split planes (outlines as drawn)
NetC1_1 on Top Layer "NETC1_1_L01_P004" (solid, pour order 4): 3745,1605 3890,1605 3890,1800 4480,1800 4475,1795 4475,1275 3790,1275 3790,1210 3730,1210 3730,1575
GND on Top Layer "GND_L01_P000" (solid, pour order 0): 3730,975 3910,975 4095,975 4095,1155 4470,1155 4470,640 3910,640 3910,790 3730,790
GND on Bottom Layer "GND_L02_P006" (solid, pour order 6): 10,1795 25,1780 25,25 2000,25 2000,125 2125,125 2125,25 3775,25 3775,60 4035,60 4040,55 4040,25 4255,25 4255,505 3895,505 3895,1790
GND on Bottom Layer "GND_L02_P003" (solid, pour order 3): 3730,975 3725,970 3725,790 3910,790 3910,640 4470,640 4470,1155 4095,1155 4095,975

## Silkscreen, mask and mechanical layers (free items; w line width, h text height)
Top Overlay:
  text "E1811HUBPCB1_4" at 2470,1580 h60
Mechanical 1:
  lines w5: 3794.72,0 2107.5,0 2107.5,55 ccw(c2067.5,55) 2027.5,55 2027.5,0 0,0 0,1810 4490,1810 4490,1265 3910,1265 3910,1170 4490,1170 4490,625 3910,625 3910,530 4290,530 4290,0 ; 3795,0 3795,39.37 ; 3795,40 4013.62,40 ; 4013.62,39.37 4013.78,0 ; 4015,0 4289.62,0

## Text inside footprints (layer, text, board x,y; h text height)
J3: Top Overlay "NO" at 4060,495 h60 r270; Top Overlay "COM" at 4060,355 h60 r270; Top Overlay "NC" at 4060,150 h60 r270